# EAGLE board d2pak_h (EAGLE 5.06)
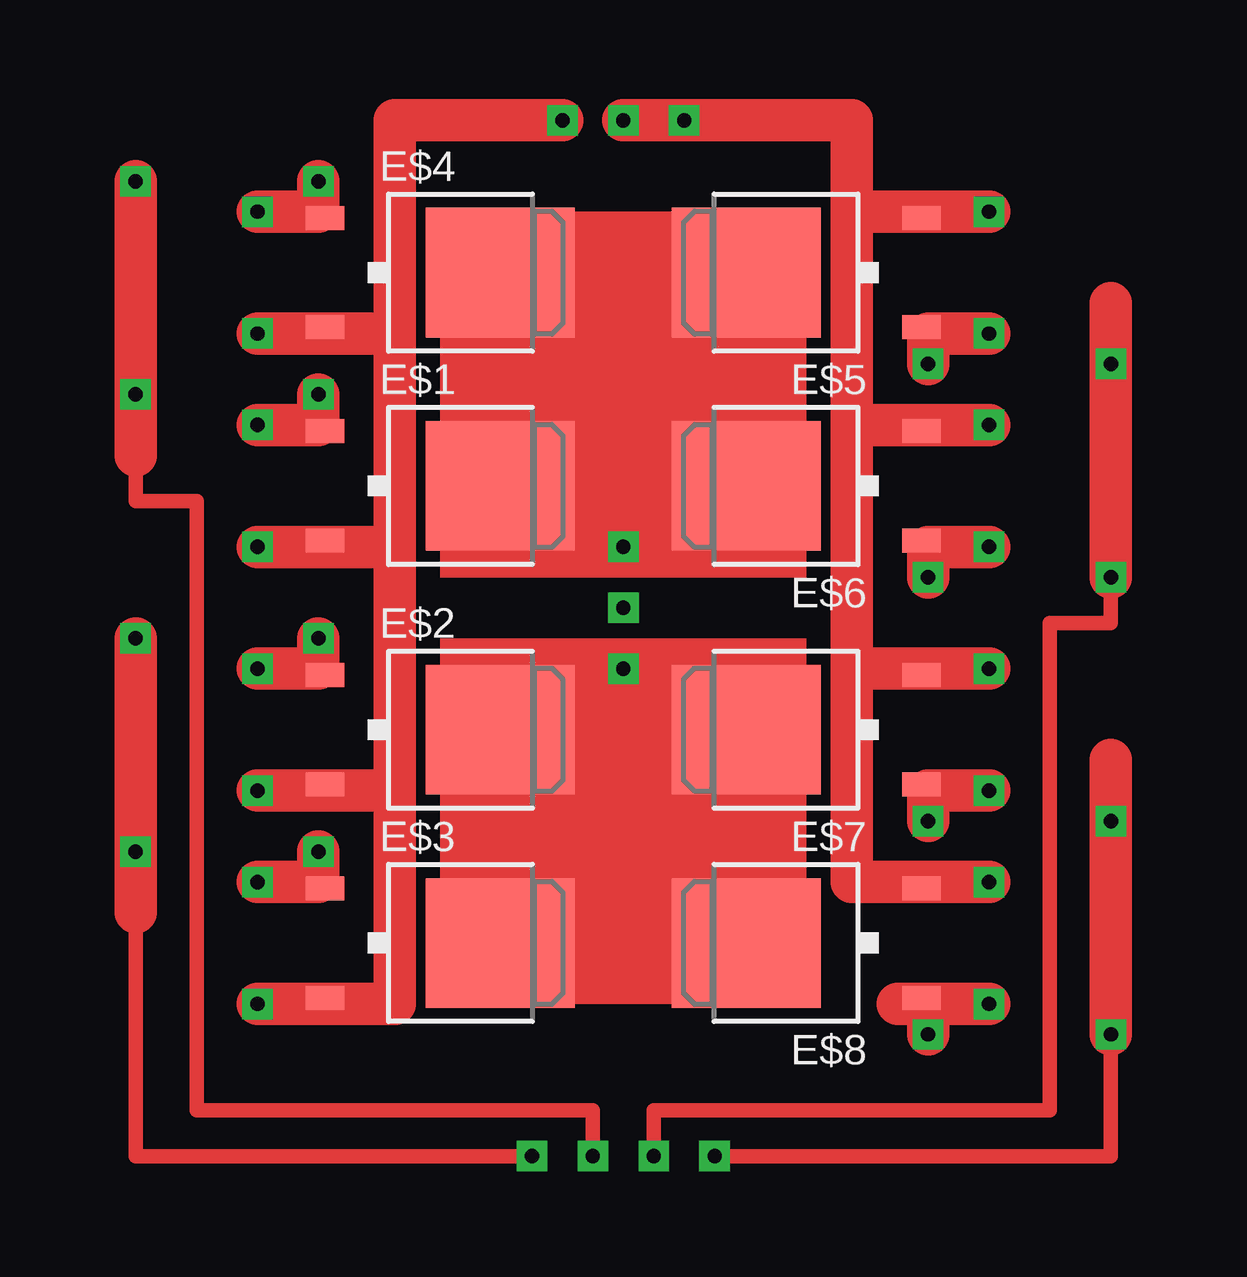
[diagram p0: board, top side]
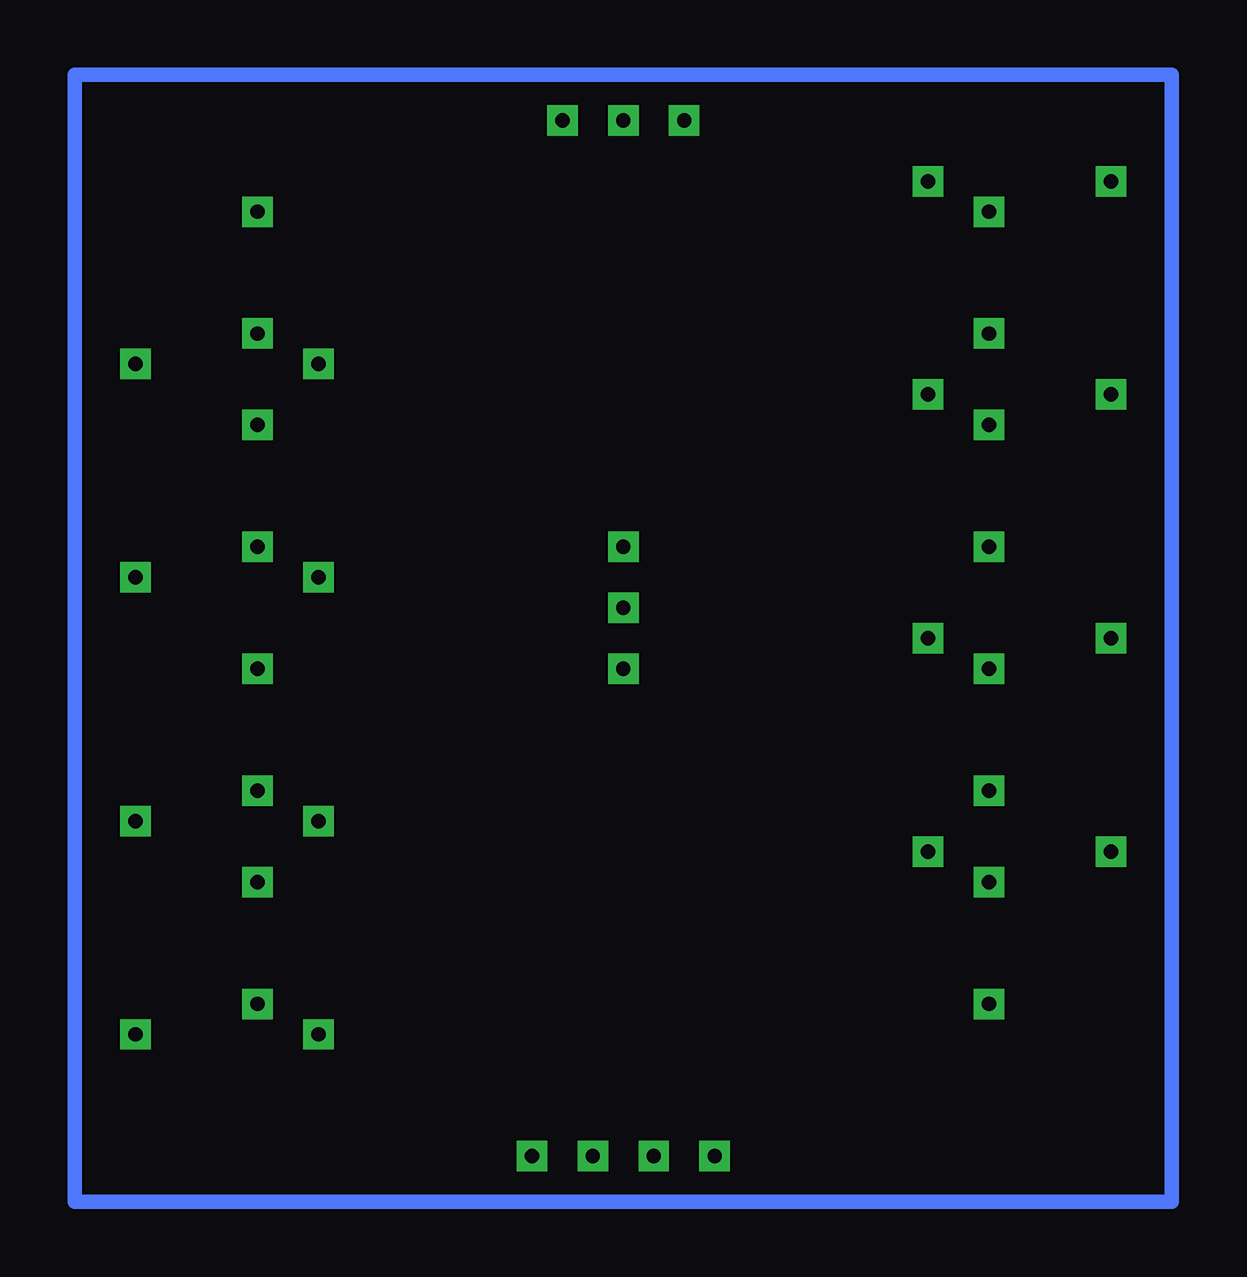
[diagram p1: board, bottom side, seen from below]

No outline drawn. Coordinates in mm, seen from the top.
Copper layers (1*16): Top 0.035mm / dielectric 1.5mm / Bottom 0.035mm
Design rules "default": minimum track width 10mil, minimum drill 24mil, track to track 8mil, track to pad 8mil, pad to pad 8mil, via to via 8mil, smd to smd 8mil, copper to edge 40mil, drill to drill 8mil, minimum pad ring 10mil, minimum via ring 8mil, stop-mask expansion 4mil, vias tented up to drill 0mil, thermal gap 10mil

## Footprints (pad centres in the part's own frame; a part is rotated, then mirrored left to right if it is on the bottom)
TO252 = smd 1 x 1.6: 1 -2.28,-4.8; 2 2.28,-4.8 | smd 5.4 x 6.2: 3 0,2.5

## Placement (x,y rotation side)
E$1  [TO252]  15.24,29.84 270 top
E$2  [TO252]  15.24,19.68 270 top
E$3  [TO252]  15.24,10.79 270 top
E$4  [TO252]  15.24,38.73 270 top
E$5  [TO252]  30.48,38.73 90 top
E$6  [TO252]  30.48,29.84 90 top
E$7  [TO252]  30.48,19.68 90 top
E$8  [TO252]  30.48,10.79 90 top

## Library data of the parts
E$1-E$8 = linear

## Tracks (layer width: path | path; a pad name or v marks a point on that pad's centre or on a via)
S$1
  Top 2.54: 29.21,10.79 27.94,10.79 27.94,20.95
S$2
  Top 1.778: 17.78,29.84 26.67,29.84
  Top 2.54: 17.78,28.57 17.78,29.84 17.78,38.73 27.94,38.73 27.94,28.57
S$3  (via drill 0.6 pad 1.27)
  Top 0.61: 2.54,31.11 2.54,29.21 5.08,29.21 5.08,3.81 21.59,3.81 v21.59,1.91
  Top 0.813: v2.54,42.55 v2.54,33.66
  Top 1.778: 2.54,31.11 v2.54,33.66 v2.54,42.55
S$4  (via drill 0.6 pad 1.27)
  Top 0.61: 2.54,12.06 2.54,1.91 v19.05,1.91
  Top 0.813: v2.54,23.5 v2.54,14.61
  Top 1.778: 2.54,12.06 v2.54,14.61 v2.54,23.5
S$5
  Bottom 0.61: 45.72,0 0,0 0,46.99 45.72,46.99 45.72,0
S$6  (via drill 0.6 pad 1.27)
  Top 1.778: v10.16,42.55 10.16,41.27 v7.62,41.27
S$7  (via drill 0.6 pad 1.27)
  Top 1.778: v10.16,33.66 10.16,32.38 v7.62,32.38
S$8  (via drill 0.6 pad 1.27)
  Top 1.778: v10.16,23.5 10.16,22.23 v7.62,22.23
S$9  (via drill 0.6 pad 1.27)
  Top 0.61: v43.18,6.99 43.18,1.91 v26.67,1.91
  Top 0.813: v43.18,6.99 v43.18,15.88 43.18,18.41
  Top 1.778: v43.18,6.99 43.18,18.41
S$10  (via drill 0.6 pad 1.27)
  Top 0.61: v43.18,26.04 43.18,24.13 40.64,24.13 40.64,3.81 24.13,3.81 v24.13,1.91
  Top 0.813: v43.18,26.04 v43.18,34.92
  Top 1.778: v43.18,26.04 v43.18,34.92 43.18,37.47
S$11  (via drill 0.6 pad 1.27)
  Top 1.778: v10.16,14.61 10.16,13.34 v7.62,13.34
S$12  (via drill 0.6 pad 1.27)
  Top 1.778: v38.1,17.14 35.56,17.14 v35.56,15.88
S$13  (via drill 0.6 pad 1.27)
  Top 1.778: v38.1,27.3 35.56,27.3 v35.56,26.04
S$14  (via drill 0.6 pad 1.27)
  Top 1.778: v38.1,36.2 35.56,36.2 v35.56,34.92
S$22
  Top 2.54: 17.78,10.79 17.78,19.68
S$25  (via drill 0.6 pad 1.27)
  Top 1.778: v20.32,45.09 13.34,45.09 13.34,36.2 | 11.43,36.2 10.16,36.2 | 11.43,36.2 v7.62,36.2 | 13.34,36.2 11.43,36.2 | 13.34,27.3 13.34,36.2 | 13.34,27.3 10.16,27.3 | 13.34,27.3 v7.62,27.3 | 13.34,17.14 13.34,27.3 | 13.34,17.14 10.16,17.14 | 13.34,17.14 v7.62,17.14 | 13.34,8.26 13.34,17.14 | 13.34,8.26 10.16,8.26 | v7.62,8.26 13.34,8.26
S$32  (via drill 0.6 pad 1.27)
  Top 1.778: v22.86,45.09 v25.4,45.09 32.38,45.09 32.38,41.27 | 32.38,41.27 35.56,41.27 | 32.38,41.27 v38.1,41.27 | 34.29,22.23 35.56,22.23 | 34.29,22.23 v38.1,22.23 | 32.38,32.38 32.38,41.27 | 32.38,32.38 35.56,32.38 | 32.38,32.38 v38.1,32.38 | 32.38,22.23 32.38,32.38 | 32.38,22.23 34.29,22.23 | 32.38,13.34 32.38,22.23 | 32.38,13.34 35.56,13.34 | 32.38,13.34 v38.1,13.34
S$33  (via drill 0.6 pad 1.27)
  Top 1.778: v38.1,8.26 35.56,8.26 | v35.56,6.99 35.56,8.26 | 35.56,8.26 34.29,8.26
S$34  (via drill 0.6 pad 1.27)
  other vias: 22.86,24.77
S$35  (via drill 0.6 pad 1.27)
  other vias: 22.86,27.3
S$36  (via drill 0.6 pad 1.27)
  other vias: 22.86,22.23
(copper drawn outside any net)
  shapes: Top area x4